# Altium PCB uw_ipmc_zynq.PcbDoc (part 3 of 3)
Units mil, origin at the board's own origin, x right, y up, seen from the top; angles counter-clockwise.
Board outline 3228.35 x 1181.1 mil, 10 copper layers (Component Side, Ground Plane 1 (GND), Inner Layer 1, Inner Layer 2, Power Plane 1, Power Plane 2, Inner Layer 3, Inner Layer 4, Power Plane 3, Solder Side), stack 39.78 mil thick; 400 components, 397 nets, 1698 pads, 375 vias.
Unrouted connection lines stored in the file: 685.
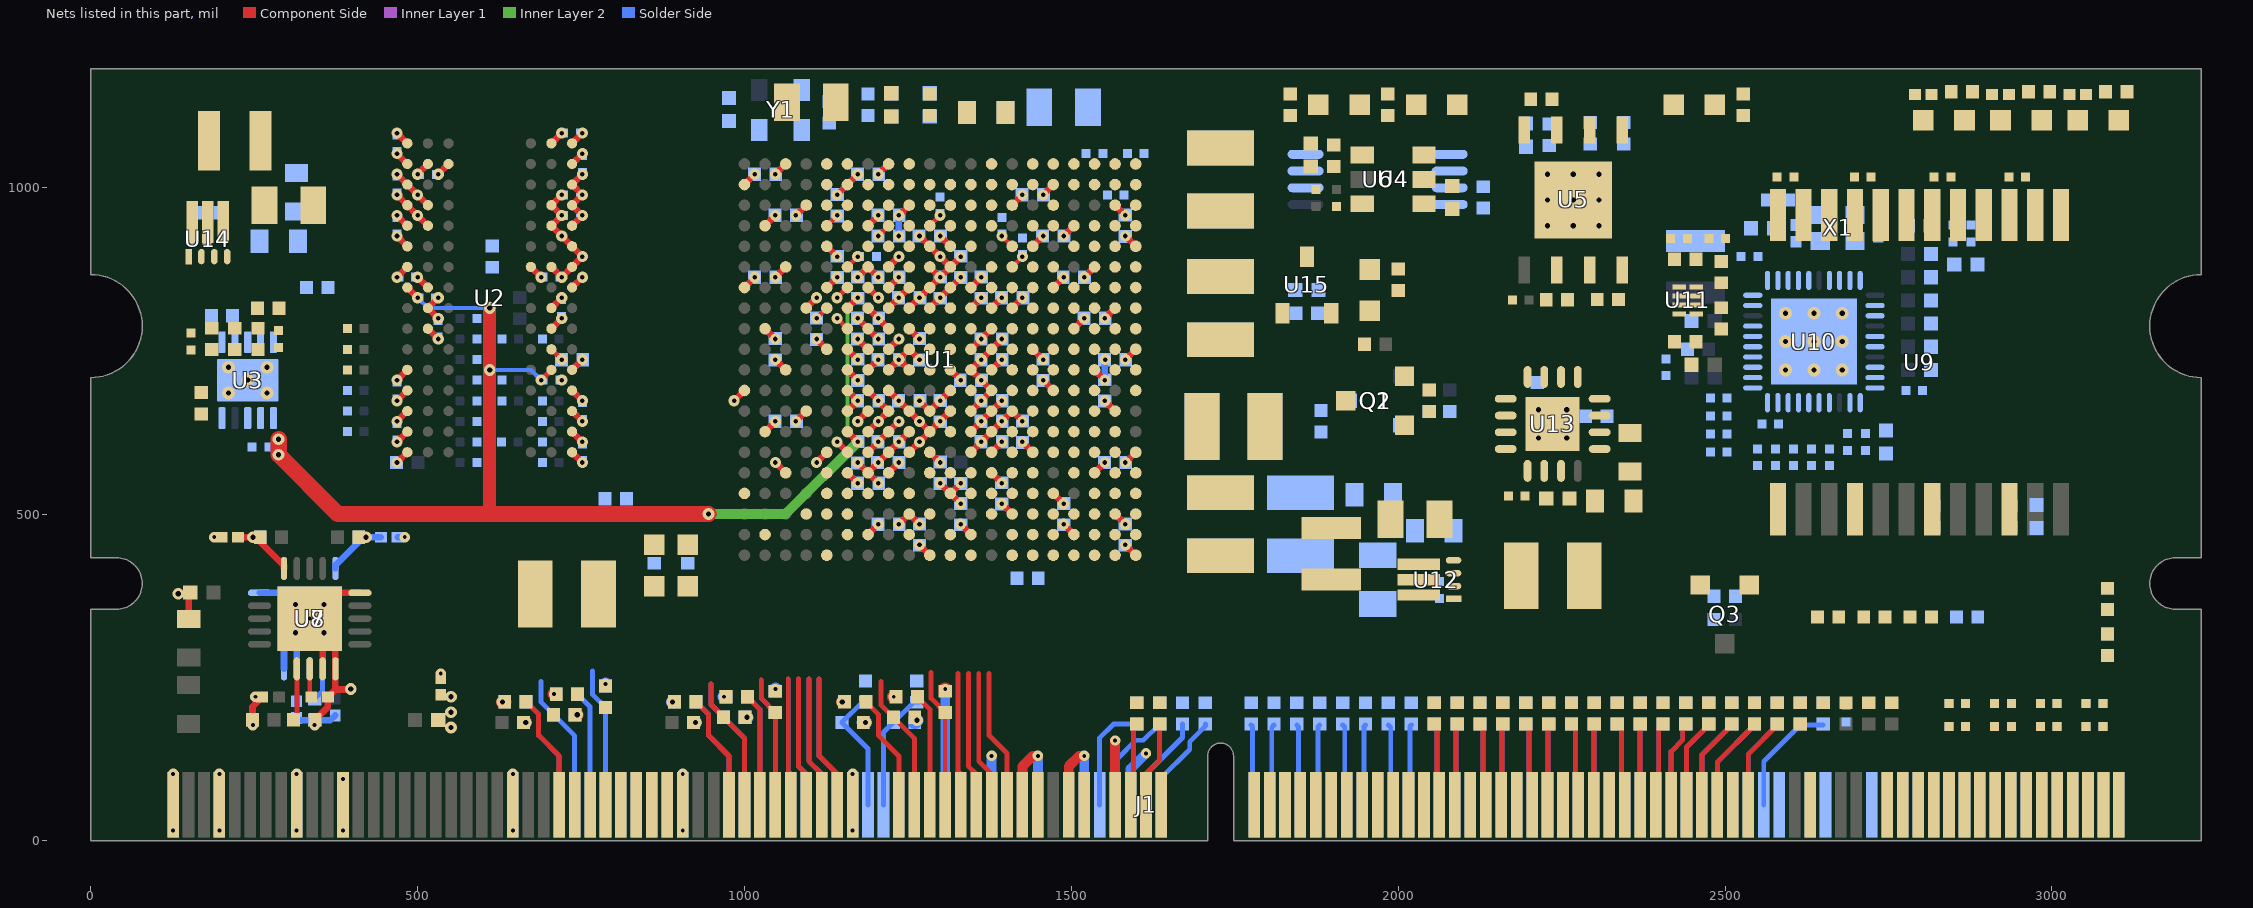
[diagram p11: the nets of this part, all layers, seen from the top]

## Via types
v1: diameter 17, hole 7, Component Side to Solder Side, 274 vias
v2: diameter 16, hole 6, Component Side to Solder Side, 42 vias
v3: diameter 19.68, hole 7.87, Component Side to Solder Side, 35 vias
v4: diameter 18, hole 8, Component Side to Solder Side, 24 vias

## Nets (pads, with @x,y where several pads share a name; then routed paths per layer and width w, separated by ;. In a path a pad name is that pad's centre, name@x,y a point inside that pad or via, vN(x,y) a via of type N, cw(c..) or ccw(c..) an arc to the next point about the centre after c; other vN are vias at no path point) (continued)
GND: C1.1 C2.1 C3.1 C4.1 C5.2 C6.2 C7.2 C8.2 C9.2 C10.2 C11.2 C12.2 C13.1 C14.1 C15.1 C16.1 C17.2 C18.2 C19.2 C20.2 C21.2 C22.2 C23.2 C24.2 C25.1 C26.1 C27.1 C28.1 C29.1 C30.2 C31.2 C32.2 C33.2 C34.2 C35.2 C36.2 C37.2 C38.2 C39.2 C40.2 C41.2 C42.2 C43.2 C44.2 C45.2 C46.2 C47.2 C48.2 C49.2 C50.2 C51.2 C52.2 C53.2 C54.2 C55.2 C56.2 C57.2 C58.2 C59.2 C60.2 C61.2 C62.2 C63.2 C64.2 C65.2 C66.2 C67.2 C68.2 C69.2 C70.2 C71.2 C72.2 C73.2 C74.2 C75.2 C76.2 C77.2 C78.2 C79.2 C80.2 C81.2 C82.2 C83.2 C84.2 C85.2 C86.2 C87.2 C88.2 C89.2 C90.2 C91.2 C92.2 C93.2 C94.2 C95.1 C96.1 C97.1 C98.1 C99.1 C100.1 C101.1 C102.1 C103.1 C104.1 C105.1 C106.1 C107.1 C108.2 C109.2 C110.2 C111.2 C112.1 C113.1 C114.1 C115.1 C116.1 C117.1 C118.1 C119.1 C120.1 C121.1 C122.1 C123.1 C124.1 C125.1 C126.1 C127.1 C128.1 C129.1 C130.1 C132.2 C134.2 C135.1 C136.1 C137.2 C139.2 C140.2 C142.2 C143.1 C144.2 C145.1 C146.1 C147.1 J1.1 J1.4 J1.9 J1.12 J1.23 J1.34 J1.45 J1.56 J1.59 J1.62 J1.89 J1.97 J1.102 J1.107 J1.111 J1.114 J1.119 J1.122 J1.123 J1.126 J1.131 J1.134 J1.145 J1.156 J1.167 J1.170 J1.173 J1.176 J1.179 J1.182 J1.185 J1.190 J1.193 J1.196 J1.199 J1.202 J1.205 J1.208 J1.211 J1.219 J1.222 J1.230 J1.233 J1.236 J1.241 J1.244 Q2.2 R29.1 R31.1 R32.1 R34.1 R43.1 R63.2 R64.2 R68.2 R71.1 R73.1 R74.1 R75.1 R80.1 R82.1 R86.1 R87.2 R88.2 R95.1 R96.1 R100.1 R101.1 R106.1 R107.1 R112.1 R113.1 R120.1 R121.1 R179.2 R180.1 R181.1 R182.1 R184.1 R185.1 R209.1 R210.1 R211.1 R212.1 R213.1 R214.1 R215.1 R216.1 U1.A8 U1.A18 U1.B1 U1.B11 U1.C4 U1.C9 U1.C14 U1.D17 U1.E10 U1.E20 U1.F3 U1.F7 U1.F10 U1.F11 U1.G10 U1.G12 U1.G16 U1.H7 U1.H9 U1.H11 U1.H13 U1.H19 U1.J2 U1.J8 U1.J10 U1.J12 U1.K5 U1.K7 U1.K9 U1.K10 U1.K11 U1.K13 U1.K15 U1.L8 U1.L9 U1.L10 U1.L12 U1.L18 U1.M1 U1.M7 U1.M11 U1.M13 U1.N4 U1.N8 U1.N10 U1.N12 U1.N14 U1.P7 U1.P9 U1.P11 U1.P13 U1.P17 U1.R8 U1.R12 U1.R20 U1.T3 U1.T7 U1.T13 U1.U6 U1.U16 U1.V9 U1.V19 U1.W2 U1.W12 U1.Y5 U1.Y15 U2.A9 U2.B1 U2.B3 U2.B9 U2.D1 U2.D8 U2.E1 U2.E2 U2.E8 U2.F9 U2.G1 U2.G8 U2.G9 U2.J2 U2.J8 U2.M1 U2.M9 U2.P1 U2.P9 U2.T1 U2.T9 U3.4 U3.8 U3.11 U4.2 U5.4 U5.9 U6.4 U7.4 U7.5 U7.10 U7.21 U8.4 U8.5 U8.10 U8.21 U10.41 U11.4 U12.5 U13.6 U13.17 U14.5 U15.1 X1.2 X1.4 Y1.2 | length 4398.8
  Component Side w10: v4(133.86,377.95) C95.1@150.24,377.95 ; R43.1@150,339.53 150,377.72 C95.1@150.24,377.95 ; C95.1@152.28,380 C95.1@150.24,377.95 ; v2(188.98,464.57) C102.1@199.8,464.57 ; C101.1@247.44,185.04 247.44,205.24 C100.1@257.32,215.12 ; v2(251.97,220.47) 252.44,220 C100.1@262.2,220 ; C96.1@343.11,185.04 362.8,204.72 C97.1@362.8,220 374.37,231.57 ; U7.4@354.68,263.23 U7.21@354.68,318.35 ; v4(397.64,232.28) 396.93,231.57 374.37,231.57 ; U7.10@411.77,379.37 374.37,379.37 v3(356.65,361.65) v2(335,340) v3(356.65,318.35) 374.37,300.63 U7.5@374.37,263.23 374.37,231.57 ; v1(468.5,578.74) U2.T1@484.25,594.49 ; v1(468.5,641.73) U2.P1@484.25,657.48 ; v1(468.5,704.72) U2.M1@484.25,720.47 ; v1(468.5,862.2) U2.G1@484.25,877.95 ; v1(468.5,956.69) U2.E1@484.25,940.94 ; v1(468.5,988.19) U2.D1@484.25,972.44 v1(500,956.69) U2.E2@515.75,940.94 ; v1(468.5,1051.18) U2.B1@484.25,1035.43 ; v1(531.5,799.21) U2.J2@515.75,814.96 v1(531.5,830.71) ; v1(531.5,1019.68) U2.B3@547.24,1035.43 ; C106.1@535.43,249.02 v2(535.43,255.91) ; U2.J8@704.72,814.96 v1(720.47,830.71) ; U2.G8@704.72,877.95 v1(720.47,862.2) U2.G9@736.22,877.95 v1(751.97,893.7) U2.F9@736.22,909.45 v1(720.47,925.2) U2.E8@704.72,940.94 v1(720.47,956.69) U2.D8@704.72,972.44 v1(720.47,988.19) ; U2.T9@736.22,594.49 v1(751.97,578.74) ; U2.P9@736.22,657.48 v1(751.97,641.73) ; U2.M9@736.22,720.47 v1(751.97,736.22) ; U2.B9@736.22,1035.43 v1(751.97,1051.18) ; U2.A9@736.22,1066.93 v1(751.97,1082.68) ; v1(984.25,673.23) U1.M1@1000,688.98 ; U1.B1@1000,1003.94 v1(1015.75,1019.68) ; U1.J2@1031.5,783.46 v1(1047.24,767.72) ; v1(1047.24,578.74) U1.T3@1062.99,562.99 ; v1(1047.24,862.2) U1.F3@1062.99,877.95 ; v1(1078.74,641.73) U1.N4@1094.49,657.48 ; v1(1078.74,956.69) U1.C4@1094.49,972.44 ; v1(1110.24,767.72) U1.K5@1125.98,751.97 ; v2(1165.35,15.75) J1.45@1165.35,55.12 v2(1165.35,102.36) ; v1(1173.23,578.74) U1.T7@1188.98,562.99 ; v1(1173.23,767.72) U1.K7@1188.98,751.97 ; v1(1173.23,862.2) U1.F7@1188.98,877.95 v1(1204.72,862.2) ; U1.P7@1188.98,625.98 v1(1204.72,641.73) U1.N8@1220.47,657.48 v1(1204.72,673.23) U1.M7@1188.98,688.98 ; U1.H7@1188.98,814.96 v1(1204.72,799.21) U1.J8@1220.47,783.46 ; v1(1204.72,547.24) U1.T7@1188.98,562.99 ; v1(1204.72,1019.68) U1.A8@1220.47,1035.43 ; U1.L8@1220.47,720.47 v1(1236.22,736.22) ; v1(1236.22,484.25) U1.V9@1251.97,500 v1(1267.72,484.25) ; v1(1236.22,956.69) U1.C9@1251.97,972.44 ; U1.P9@1251.97,625.98 v1(1236.22,610.24) U1.R8@1220.47,594.49 v1(1204.72,578.74) U1.T7@1188.98,562.99 ; U1.L9@1251.97,720.47 v1(1236.22,736.22) ; U1.H9@1251.97,814.96 v1(1267.72,830.71) U1.G10@1283.46,846.46 v1(1299.21,862.2) ; v1(1267.72,673.23) U1.N10@1283.46,657.48 v1(1299.21,673.23) U1.M11@1314.96,688.98 ; v1(1267.72,736.22) U1.K9@1251.97,751.97 v1(1236.22,736.22) ; v1(1267.72,925.2) U1.E10@1283.46,909.45 v1(1299.21,893.7) U1.F11@1314.96,877.95 ; U1.F10@1283.46,877.95 v1(1299.21,862.2) ; v1(1330.71,484.25) U1.W12@1346.46,468.5 ; v1(1330.71,893.7) U1.F11@1314.96,877.95 ; U1.R12@1346.46,594.49 v1(1362.2,610.24) U1.P13@1377.95,625.98 v1(1393.7,641.73) U1.N14@1409.45,657.48 v1(1425.2,641.73) ; U1.N12@1346.46,657.48 v1(1362.2,673.23) U1.M13@1377.95,688.98 v1(1362.2,704.72) U1.L12@1346.46,720.47 v1(1362.2,736.22) U1.K13@1377.95,751.97 v1(1393.7,767.72) ; U1.G12@1346.46,846.46 v1(1362.2,862.2) ; U1.T13@1377.95,562.99 v1(1393.7,547.24) ; U1.H13@1377.95,814.96 v1(1393.7,830.71) ; U1.C14@1409.45,972.44 v1(1425.2,988.19) ; U1.K15@1440.94,751.97 v1(1456.69,736.22) ; U1.U16@1472.44,531.5 v1(1488.19,515.75) ; U1.G16@1472.44,846.46 v1(1488.19,862.2) ; v1(1488.19,925.2) U1.D17@1503.94,940.94 ; U1.L18@1535.43,720.47 v1(1551.18,704.72) ; v1(1551.18,799.21) U1.H19@1566.93,814.96 ; U1.V19@1566.93,500 v1(1582.68,484.25) ; v1(1582.68,578.74) U1.R20@1598.43,594.49 ; v1(1582.68,925.2) U1.E20@1598.43,909.45 ; v1(1299.21,862.2) U1.F11@1314.96,877.95
  Component Side w12: v2(905.51,15.75) J1.34@905.51,55.12 v2(905.51,102.36)
  Component Side w15: v2(125.98,15.75) J1.1@125.98,55.12 v2(125.98,102.36) ; v2(196.85,15.75) J1.4@196.85,55.12 v2(196.85,102.36) ; v2(314.96,15.75) J1.9@314.96,55.12 v2(314.96,102.36) ; v2(385.83,15.75) J1.12@385.83,55.12 ; J1.56@1425.2,55.12 1425.2,114.17 1440.94,129.92 v2(1448.82,129.92) ; J1.59@1496.06,55.12 1496.06,114.17 1511.81,129.92 v2(1519.69,129.92) ; J1.62@1566.93,55.12 v2(1566.93,153.54)
  Component Side w20: v2(708.66,224.41) R95.1@712.01,224.41 ; v2(1228.35,220.47) R120.1@1231.69,220.47 ; R121.1@1307.09,228.94 v2(1307.09,232.28)
  Solder Side w10: C104.1@247.44,185.04 247.44,177.76 v2(248.03,177.17) ; U8.10@258.23,379.37 295.63,379.37 v3(313.35,361.65) v2(335,340) 315.31,320.32 U8.4@315.31,263.23 ; U8.5@295.63,263.23 295.63,300.63 v3(313.35,318.35) ; C99.1@314.96,187.99 318.5,184.45 C98.1@342.52,184.45 ; v2(342.52,177.17) C98.1@342.52,184.45 ; C103.1@374.02,191.93 366.54,184.45 C98.1@342.52,184.45 ; C105.1@469.49,464.57 v2(480.31,464.57) ; C4.1@717.52,704.72 v1(720.47,704.72) ; v1(1236.22,925.19) C40.2@1236.22,956.1 ; C54.2@1551.18,701.38 v1(1551.18,704.72) 1551.18,735.64 v1(1551.76,736.22)
  Solder Side w12: v2(645.67,15.75) J1.145@645.67,55.12 v2(645.67,102.36)
  Solder Side w15: J1.134@385.83,55.12 v2(385.83,94.49) ; J1.173@1307.09,55.12 v2(1307.09,232.28) ; J1.176@1377.95,55.12 v2(1377.95,129.92) ; J1.179@1448.82,55.12 v2(1448.82,129.92) ; J1.182@1519.69,55.12 v2(1519.69,129.92) ; J1.185@1590.55,55.12 1590.55,110.24 v2(1614.17,133.86)
  Solder Side w20: R101.1@787.4,236.81 v2(787.4,240.16) ; v2(968.5,220.47) R112.1@971.85,220.47 ; R113.1@1047.24,228.94 v2(1047.24,232.28)
  other v3: 313.35,318.35 356.65,318.35 313.35,361.65 356.65,361.65 2214.57,616.14 2257.87,616.14 2214.57,659.45 2257.87,659.45 210.63,685.04 269.69,685.04 240.16,704.72 2592.52,720.47 2635.83,720.47 2679.13,720.47 210.63,724.41 269.69,724.41 2592.52,763.78 2635.83,763.78 2679.13,763.78 2592.52,807.09 2635.83,807.09 2679.13,807.09 2228.35,940.94 2267.72,940.94 2307.09,940.94 2228.35,980.32 2267.72,980.32 2307.09,980.32 2228.35,1019.69 2267.72,1019.69 2307.09,1019.69
GPIO_0: J1.168 R3.2 R114.1 | length 191.4
  Solder Side w7.5: R114.1@1185.04,212.01 1179.92,212.01 R3.2@1149.02,181.1 1188.98,141.14 J1.168@1188.98,55.12
GPIO_1: J1.169 R4.2 R115.1 | length 185
  Solder Side w7.5: J1.169@1212.6,55.12 1212.6,165.95 R4.2@1227.76,181.1 1258.66,212.01 R115.1@1267.72,212.01
GPIO_2: J1.183 R116.1 | length 167.8
  Solder Side w7.5: J1.183@1543.31,55.12 1543.31,157.48 1564.49,178.66 R116.1@1600,178.66
GPIO_3: J1.184 R122.1 | length 158.5
  Solder Side w7.5: J1.184@1566.93,55.12 1570.87,59.06 1570.87,125.98 1598.78,153.9 1610.24,153.9 R122.1@1635,178.66
GPIO_4: J1.63 R123.1 | length 126.1
  Component Side w7.5: J1.63@1590.55,55.12 1595.28,59.84 1595.28,172.56 R123.1@1600,177.28
GPIO_5: J1.64 R124.1 | length 132.2
  Component Side w7.5: J1.64@1614.17,55.12 1614.17,102.36 1635,123.19 R124.1@1635,178.66
GPIO_6: J1.186 R125.1 | length 146.7
  Solder Side w7.5: J1.186@1614.17,55.12 1614.17,102.36 1670,158.19 R125.1@1670,178.66
GPIO_7: J1.187 R126.1 | length 151.4
  Solder Side w7.5: J1.187@1637.8,55.12 1637.8,96.46 1681.1,139.76 1681.1,151.42 1705,175.32 R126.1@1705,178.66
GPIO_8: J1.188 R127.1 | length 124
  Solder Side w7.5: R127.1@1775,177.28 1777.26,175.02 1777.26,57.38 J1.188@1779.53,55.12
GPIO_9: J1.189 R128.1 | length 125
  Solder Side w7.5: J1.189@1803.15,55.12 1806.57,58.54 1806.57,173.86 R128.1@1810,177.28
GPIO_10: J1.191 R129.1 | length 124.4
  Solder Side w7.5: R129.1@1845,177.28 1847.7,174.59 1847.7,57.82 J1.191@1850.39,55.12
GPIO_11: J1.192 R130.1 | length 124.6
  Solder Side w7.5: J1.192@1874.02,55.12 1877.01,58.11 1877.01,174.29 R130.1@1880,177.28
GPIO_12: J1.194 R131.1 | length 124.8
  Solder Side w7.5: R131.1@1915,177.28 1918.13,174.15 1918.13,58.25 J1.194@1921.26,55.12
GPIO_13: J1.195 R102.1 | length 124.3
  Solder Side w7.5: J1.195@1944.88,55.12 1947.44,57.68 1947.44,174.72 R102.1@1950,177.28
GPIO_14: J1.197 R142.1 | length 125.1
  Solder Side w7.5: R142.1@1985,177.28 1988.56,173.72 1988.56,58.68 J1.197@1992.13,55.12
GPIO_15: J1.198 R143.1 | length 123.9
  Solder Side w7.5: J1.198@2015.75,55.12 2017.87,57.24 2017.87,175.16 R143.1@2020,177.28
GPIO_16: J1.78 R144.1 | length 125.5
  Component Side w7.5: R144.1@2055,177.28 2059,173.29 2059,59.11 J1.78@2062.99,55.12
GPIO_17: J1.200 R145.1 | length 125.5
  Solder Side w7.5: R145.1@2055,177.28 2059,173.29 2059,59.11 J1.200@2062.99,55.12
GPIO_18: J1.79 R146.1 | length 123.6
  Component Side w7.5: J1.79@2086.61,55.12 2088.31,56.81 2088.31,175.59 R146.1@2090,177.28
GPIO_19: J1.201 R147.1 | length 123.6
  Solder Side w7.5: J1.201@2086.61,55.12 2088.31,56.81 2088.31,175.59 R147.1@2090,177.28
GPIO_20: J1.81 R148.1 | length 125.8
  Component Side w7.5: R148.1@2125,177.28 2129.43,172.85 2129.43,59.55 J1.81@2133.86,55.12
GPIO_21: J1.203 R149.1 | length 125.8
  Solder Side w7.5: R149.1@2125,177.28 2129.43,172.85 2129.43,59.55 J1.203@2133.86,55.12
GPIO_22: J1.82 R150.1 | length 123.2
  Component Side w7.5: J1.82@2157.48,55.12 2158.74,56.38 2158.74,176.02 R150.1@2160,177.28
GPIO_23: J1.204 R151.1 | length 123.2
  Solder Side w7.5: J1.204@2157.48,55.12 2158.74,56.38 2158.74,176.02 R151.1@2160,177.28
GPIO_24: J1.84 R152.1 | length 126.2
  Component Side w7.5: R152.1@2195,177.28 2199.87,172.42 2199.87,59.98 J1.84@2204.72,55.12
GPIO_25: J1.206 R153.1 | length 126.2
  Solder Side w7.5: R153.1@2195,177.28 2199.87,172.42 2199.87,59.98 J1.206@2204.72,55.12
GPIO_26: J1.85 R154.1 | length 122.9
  Component Side w7.5: J1.85@2228.35,55.12 2229.17,55.94 2229.17,176.46 R154.1@2230,177.28
GPIO_27: J1.207 R155.1 | length 122.9
  Solder Side w7.5: J1.207@2228.35,55.12 2229.17,55.94 2229.17,176.46 R155.1@2230,177.28
GPIO_28: J1.87 R156.1 | length 126.6
  Component Side w7.5: R156.1@2265,177.28 2270.73,171.55 2270.73,59.98 J1.87@2275.59,55.12
GPIO_29: J1.209 R157.1 | length 126.6
  Solder Side w7.5: R157.1@2265,177.28 2270.73,171.55 2270.73,59.98 J1.209@2275.59,55.12
GPIO_30: J1.88 R158.1 | length 122.5
  Component Side w7.5: J1.88@2299.21,55.12 2299.61,55.51 2299.61,176.89 R158.1@2300,177.28
GPIO_31: J1.210 R159.1 | length 122.5
  Solder Side w7.5: J1.210@2299.21,55.12 2299.61,55.51 2299.61,176.89 R159.1@2300,177.28
GPIO_32: J1.90 R160.1 | length 126.9
  Component Side w7.5: R160.1@2335,177.28 2341.6,170.68 2341.6,59.98 J1.90@2346.46,55.12
GPIO_33: J1.212 R161.1 | length 126.9
  Solder Side w7.5: R161.1@2335,177.28 2341.6,170.68 2341.6,59.98 J1.212@2346.46,55.12
GPIO_34: J1.91 R162.1 | length 122.2
  Component Side w7.5: R162.1@2370,177.28 2370.04,177.24 J1.91@2370.08,55.12 J1.91@2370.08,55.12
GPIO_35: J1.213 R163.1 | length 122.2
  Solder Side w7.5: R163.1@2370,177.28 2370.04,177.24 J1.213@2370.08,55.12 J1.213@2370.08,55.12
GPIO_36: J1.92 R164.1 | length 126.8
  Component Side w7.5: J1.92@2393.7,55.12 2398.56,59.98 2398.56,170.84 R164.1@2405,177.28
GPIO_37: J1.214 R165.1 | length 126.8
  Solder Side w7.5: J1.214@2393.7,55.12 2398.56,59.98 2398.56,170.84 R165.1@2405,177.28
GPIO_38: J1.93 R166.1 | length 131.6
  Component Side w7.5: J1.93@2417.32,55.12 2417.32,136.58 2435.2,154.46 2435.2,172.49 R166.1@2440,177.28
GPIO_39: J1.215 R167.1 | length 131.6
  Solder Side w7.5: J1.215@2417.32,55.12 2417.32,136.58 2435.2,154.46 2435.2,172.49 R167.1@2440,177.28
GPIO_40: J1.94 R168.1 | length 136.3
  Component Side w7.5: J1.94@2440.94,55.12 2440.94,143.23 R168.1@2475,177.28
GPIO_41: J1.216 R169.1 | length 136.3
  Solder Side w7.5: J1.216@2440.94,55.12 2440.94,143.23 R169.1@2475,177.28
GPIO_42: J1.95 R170.1 | length 141
  Component Side w7.5: J1.95@2464.57,55.12 2464.57,131.85 R170.1@2510,177.28
GPIO_43: J1.217 R171.1 | length 141
  Solder Side w7.5: J1.217@2464.57,55.12 2464.57,131.85 R171.1@2510,177.28
GPIO_44: J1.96 R172.1 | length 145.7
  Component Side w7.5: J1.96@2488.19,55.12 2488.19,120.47 R172.1@2545,177.28
GPIO_45: J1.218 R173.1 | length 145.7
  Solder Side w7.5: J1.218@2488.19,55.12 2488.19,120.47 R173.1@2545,177.28
GPIO_46: J1.98 R174.1 | length 140.6
  Component Side w7.5: J1.98@2535.43,55.12 2535.43,132.72 R174.1@2580,177.28
GPIO_47: J1.220 R1.2 R175.1 | length 140.6
  Solder Side w7.5: J1.220@2535.43,55.12 2535.43,132.72 R175.1@2580,177.28
GPIO_48: J1.221 R2.2 R132.1 | length 180.3
  Solder Side w7.5: J1.221@2559.06,55.12 2559.06,121.34 2615,177.28 R2.2@2650,177.28
HA0: J1.115 R199.2 R209.2 U1.E12
HA1: J1.237 R200.2 R210.2 U1.A9
HA2: J1.116 R201.2 R211.2 U1.F13
HA3: J1.238 R202.2 R212.2 U1.B15
HA4: J1.117 R203.2 R213.2 U1.D16
HA5: J1.239 R204.2 R214.2 U1.B14
HA6: J1.118 R205.2 R215.2 U1.B12
HA7: J1.240 R206.2 R216.2 U1.C12
HNDL_SW: J1.224 R139.2 U1.E19
INIT_B: R39.1 U1.R10 | length 22.3
  Component Side w10: U1.R10@1283.46,594.49 v1(1299.21,578.74)
IPMB-A_SCL: J1.120 R189.1 U1.E9
IPMB-A_SDA: J1.121 R190.1 U1.C6
IPMB-B_SCL: J1.242 R191.1 U1.D9
IPMB-B_SDA: J1.243 R192.1 U1.E8
IPMB-L_SCL_0: J1.26 R93.2 U1.W9 | length 178.4
  Component Side w7.5: R93.2@665.94,212.6 685.04,193.5 685.04,161.42 716.54,129.92 J1.26@716.54,55.12
IPMB-L_SCL_1: J1.148 R98.2 U1.V10 | length 178.4
  Solder Side w7.5: R98.2@665.94,212.6 685.04,193.5 685.04,161.42 716.54,129.92 J1.148@716.54,55.12
IPMB-L_SCL_2: J1.37 R104.2 U1.T14 | length 178.4
  Component Side w7.5: R104.2@925.79,212.6 944.88,193.5 944.88,161.42 976.38,129.92 J1.37@976.38,55.12
IPMB-L_SCL_3: J1.159 R110.2 U1.V15 | length 178.4
  Solder Side w7.5: R110.2@925.79,212.6 944.88,193.5 944.88,161.42 976.38,129.92 J1.159@976.38,55.12
IPMB-L_SCL_4: J1.48 R118.2 U1.T20 | length 178.4
  Component Side w7.5: R118.2@1185.63,212.6 1204.72,193.5 1204.72,161.42 1236.22,129.92 J1.48@1236.22,55.12
IPMB-L_SDA_0: J1.27 R94.2 U1.U9
IPMB-L_SDA_1: J1.149 R99.2 U1.V6 | length 210.2
  Solder Side w7.5: 688.98,244.09 688.98,212.01 R99.2@708.07,192.91 740.16,160.83 J1.149@740.16,55.12
IPMB-L_SDA_2: J1.38 R105.2 U1.T15 | length 206.2
  Component Side w7.5: 948.82,240.16 948.82,208.66 967.91,189.57 R105.2@967.91,188.98 1000,156.89 J1.38@1000,55.12
IPMB-L_SDA_3: J1.160 R111.2 U1.W15 | length 206.2
  Solder Side w7.5: 948.82,240.16 948.82,208.66 967.91,189.57 R111.2@967.91,188.98 1000,156.89 J1.160@1000,55.12
IPMB-L_SDA_4: J1.49 R119.2 U1.U20 | length 210.2
  Component Side w7.5: 1208.66,244.09 1208.66,208.07 R119.2@1227.76,188.98 1259.84,156.89 J1.49@1259.84,55.12
JTAG_MASTER_TCK: J1.231 R135.1
JTAG_MASTER_TDI: J1.232 U1.E17
JTAG_MASTER_TDO: J1.109 R136.1
JTAG_MASTER_TMS: J1.110 R134.1
JTAG_MASTER_TRST: J1.108 R133.1
LED_10_100: C117.2 D2.2 U10.24
LED_1000: C116.2 D3.2 R65.1 U10.22
LED_ACT: C118.2 D1.2 R66.1 U10.21
MDC: R61.1 U10.40 U11.7
MDIO: R60.1 U10.39 U11.6
MDIO_CLK: R58.1 U1.C10 U11.2
MDIO_DIO: R59.1 U1.C11 U11.3
MP_ENA_0: J1.28 R95.2 U1.U8
MP_ENA_1: J1.150 R100.2 U1.W6 | length 177.2
  Solder Side w7.5: R100.2@744.69,224.41 763.78,205.31 J1.150@763.78,55.12
MP_ENA_2: J1.39 R106.2 U1.P14 | length 173.3
  Component Side w7.5: R106.2@1004.53,220.47 1023.62,201.38 J1.39@1023.62,55.12
MP_ENA_3: J1.161 R112.2 U1.U14 | length 173.3
  Solder Side w7.5: R112.2@1004.53,220.47 1023.62,201.38 J1.161@1023.62,55.12
MP_ENA_4: J1.50 R120.2 U1.V20 | length 173.3
  Component Side w7.5: R120.2@1264.37,220.47 1283.46,201.38 J1.50@1283.46,55.12
MP_FLT_0: J1.32 U1.U5
MP_FLT_1: J1.154 U1.U12
MP_FLT_2: J1.43 U1.W14 | length 201.1
  Component Side w7.5: 1098.43,248.03 1098.43,122.05 1118.11,102.36 J1.43@1118.11,55.12
MP_FLT_3: J1.165 U1.N18 | length 201.1
  Solder Side w7.5: 1098.43,248.03 1098.43,122.05 1118.11,102.36 J1.165@1118.11,55.12
MP_FLT_4: J1.54 U1.V16 | length 208.9
  Component Side w7.5: 1358.27,255.91 1358.27,122.05 1377.95,102.36 J1.54@1377.95,55.12
MP_PG_0: J1.30 U1.Y11
MP_PG_1: J1.152 U1.T10
MP_PG_2: J1.41 U1.Y16 | length 194.5
  Component Side w7.5: 1066.93,248.03 1066.93,106.3 1070.87,102.36 J1.41@1070.87,55.12
MP_PG_3: J1.163 U1.U18 | length 194.5
  Solder Side w7.5: 1066.93,248.03 1066.93,106.3 1070.87,102.36 J1.163@1070.87,55.12
MP_PG_4: J1.52 U1.Y18 | length 202.4
  Component Side w7.5: 1326.77,255.91 1326.77,106.3 1330.71,102.36 J1.52@1330.71,55.12
NetC27_2: C27.2 R33.1 R34.2 U3.1
NetC96_2: C96.2 U7.2 | length 80.2
  Component Side w7.5: C96.2@310.43,185.04 315.31,189.92 U7.2@315.31,263.23
NetC97_2: C97.2 U7.3 | length 44.1
  Component Side w7.5: U7.3@335,263.23 335,222.2 C97.2@337.2,220
NetC98_2: C98.2 U8.2 | length 51.1
  Solder Side w7.5: C98.2@342.52,217.13 354.69,229.29 U8.2@354.69,263.23
NetC99_2: C99.2 U8.3
NetC107_2: C107.2 R48.2 R49.2 R50.2 R51.2
NetC108_1: C108.1 U9.15
NetC109_1: C109.1 U9.18
NetC110_1: C110.1 U9.21
NetC111_1: C111.1 U9.24
NetC112_2: C112.2 U10.4 X1.1
NetC113_2: C113.2 U10.5 X1.3
NetC140_1: C140.1 U13.7
NetD1_1: D1.1 R67.2
NetD2_1: D2.1 R69.2
NetD3_1: D3.1 R70.2
NetD4_2: D4.2 R87.1
NetD5_2: D5.2 R88.1
NetD6_2: D6.2 R90.1
NetD7_2: D7.2 R91.1
NetD8_2: D8.2 R207.1
NetD9_2: D9.2 R208.1
NetL6_2: L6.2 U10.2
NetL8_1: L8.1 U12.6
NetL9_1: L9.1 U14.6
NetQ2_D: Q2.3 R84.1
NetR41_2: R41.2 U1.F6 | length 22.3
  Component Side w7: U1.F6@1157.48,877.95 v1(1173.23,893.7)
NetR48_1: R48.1 U9.1
NetR49_1: R49.1 U9.4
NetR50_1: R50.1 U9.7
NetR51_1: R51.1 U9.10
NetR62_1: R62.1 U10.20
NetR63_1: R63.1 U10.7
NetR77_1: R77.1 R80.2 U12.3
NetR79_1: R79.1 R82.2 U13.9
NetR85_1: R85.1 R86.2 U14.3
NetR102_2: R102.2 U1.R19
NetR108_2: R108.2 U1.U13
NetR132_2: R132.2 U1.G14
NetR133_2: R133.2 U1.C20
NetR134_2: R134.2 U1.B20
NetR135_2: R135.2 U1.B19
NetR136_2: R136.2 U1.A20 | length 1.4
  Component Side w7.5: U1.A20@1598.43,1035.43 U1.A20@1599.41,1036.42
NetR137_2: R137.2 U1.D18
NetR138_2: R138.2 U1.D19
NetR140_2: R140.2 U1.D20
NetR141_2: R141.2 U1.E18
PG_A: J1.228 U1.M20
PG_B: J1.229 U1.M17
PGOOD_1.0V: R83.1 U12.2 U13.4
PGOOD_1.5V: R89.1 U14.2
PGOOD_1.8V: Q2.1 R81.1 U13.5 U14.1
PHY_RESET: R68.1 U1.B5 U10.1
PL_GPIO_0: R114.2 U1.R16
PL_GPIO_1: R115.2 U1.R17
PL_GPIO_2: R116.2 U1.T17
PL_GPIO_3: R122.2 U1.R18
PL_GPIO_4: R123.2 U1.V17
PL_GPIO_5: R124.2 U1.V18
PL_GPIO_6: R125.2 U1.W18
PL_GPIO_7: R126.2 U1.W19
PL_GPIO_8: R127.2 U1.N17
PL_GPIO_9: R128.2 U1.P18
PL_GPIO_10: R129.2 U1.P15
PL_GPIO_11: R130.2 U1.P16
PL_GPIO_12: R131.2 U1.T19
PL_GPIO_14: R142.2 U1.M18
PL_GPIO_15: R143.2 U1.L19
PL_GPIO_16: R144.2 U1.L20
PL_GPIO_17: R145.2 U1.K19
PL_GPIO_18: R146.2 U1.J19
PL_GPIO_19: R147.2 U1.L16
PL_GPIO_20: R148.2 U1.L17
PL_GPIO_21: R149.2 U1.K17
PL_GPIO_22: R150.2 U1.K18
PL_GPIO_23: R151.2 U1.H16
PL_GPIO_24: R152.2 U1.H17
PL_GPIO_25: R153.2 U1.J18
PL_GPIO_26: R154.2 U1.H18
PL_GPIO_27: R155.2 U1.F19
PL_GPIO_28: R156.2 U1.F20
PL_GPIO_29: R157.2 U1.G17
PL_GPIO_30: R158.2 U1.G18
PL_GPIO_31: R159.2 U1.J20
PL_GPIO_32: R160.2 U1.H20
PL_GPIO_33: R161.2 U1.G19
PL_GPIO_34: R162.2 U1.G20
PL_GPIO_35: R163.2 U1.H15
PL_GPIO_36: R164.2 U1.G15
PL_GPIO_37: R165.2 U1.K14
PL_GPIO_38: R166.2 U1.J14
PL_GPIO_39: R167.2 U1.N15
PL_GPIO_40: R168.2 U1.N16
PL_GPIO_41: R169.2 U1.L14
PL_GPIO_42: R170.2 U1.L15
PL_GPIO_43: R171.2 U1.M14
PL_GPIO_44: R172.2 U1.M15
PL_GPIO_45: R173.2 U1.K16
PL_GPIO_46: R174.2 U1.J16
PL_GPIO_47: R175.2 U1.J15
PL_LED_RED: R91.2 U1.U7
PL_LED_YELLOW: R90.2 U1.V5
PROG_B: R38.1 U1.L6 | length 22.3
  Component Side w10: U1.L6@1157.48,720.47 v1(1173.23,704.72)
PS_CLK: R177.1 U1.E7
PS_LED_RED: R207.2 U1.B9
PS_LED_YELLOW: R208.2 U1.B13
PS_MIO7: R185.2 U1.D8 | length 22.3
  Component Side w7.5: v1(1204.72,925.2) U1.D8@1220.47,940.94
PS_MIO8: R186.2 U1.D5 | length 22.3
  Component Side w7.5: U1.D5@1125.98,940.94 v1(1141.73,956.69)
PS_POR_B: R176.2 U1.C7 U15.3
PS_SRST_B: Q3.2 R196.1 U1.B10
PS_TX_CLK: R187.1 U1.A19
PS_TX_CTL: R198.1 U1.F14 | length 22.3
  Component Side w7: U1.F14@1409.45,877.95 v1(1425.2,893.7)
PS_TX_D0: R188.1 U1.E14 | length 22.3
  Component Side w7: v1(1393.7,925.2) U1.E14@1409.45,909.45
PS_TX_D1: R193.1 U1.B18
PS_TX_D2: R194.1 U1.D10 | length 22.3
  Component Side w7: U1.D10@1283.46,940.94 v1(1299.21,956.69)
PS_TX_D3: R195.1 U1.A17
PWR_ENA_0: J1.29 R96.2 U1.W11
PWR_ENA_1: J1.151 R101.2 U1.T11 | length 212.9
  Solder Side w7.5: 767.72,259.84 767.72,223.82 R101.2@787.4,204.13 J1.151@787.4,55.12
PWR_ENA_2: J1.40 R107.2 U1.R14 | length 199.9
  Component Side w7.5: 1025.59,246.06 1025.59,217.91 R107.2@1047.24,196.26 J1.40@1047.24,55.12
PWR_ENA_3: J1.162 R113.2 U1.U15 | length 199.9
  Solder Side w7.5: 1025.59,246.06 1025.59,217.91 R113.2@1047.24,196.26 J1.162@1047.24,55.12
PWR_ENA_4: J1.51 R121.2 U1.W20 | length 211.7
  Component Side w7.5: 1285.43,257.87 1285.43,217.91 R121.2@1307.09,196.26 J1.51@1307.09,55.12
PWR_FLT_0: J1.33 U1.Y12
PWR_FLT_1: J1.155 U1.V13
PWR_FLT_2: J1.44 U1.Y14 | length 204.3
  Component Side w7.5: 1114.17,248.03 1114.17,129.92 1141.73,102.36 J1.44@1141.73,55.12
PWR_FLT_3: J1.166 U1.P19 | length 204.3
  Solder Side w7.5: 1114.17,248.03 1114.17,129.92 1141.73,102.36 J1.166@1141.73,55.12
PWR_FLT_4: J1.55 U1.W16 | length 212.2
  Component Side w7.5: 1374.02,255.91 1374.02,161.42 1401.57,133.86 J1.55@1401.57,55.12
PWR_PG_0: J1.31 U1.T5
PWR_PG_1: J1.153 U1.T12
PWR_PG_2: J1.42 U1.Y17 | length 197.8
  Component Side w7.5: 1082.68,248.03 1082.68,114.17 1094.49,102.36 J1.42@1094.49,55.12
PWR_PG_3: J1.164 U1.U19 | length 197.8
  Solder Side w7.5: 1082.68,248.03 1082.68,114.17 1094.49,102.36 J1.164@1094.49,55.12
PWR_PG_4: J1.53 U1.Y19 | length 205.7
  Component Side w7.5: 1342.52,255.91 1342.52,114.17 1354.33,102.36 J1.53@1354.33,55.12
PYLD12V_EN: J1.225 U1.F16
QSPI_CLK: R184.2 U1.A5 U5.6
QSPI_DQ0: R180.2 U1.B8 U5.5
QSPI_DQ1: R181.2 U1.D6 U5.2
QSPI_DQ2: R182.2 U1.B7 U5.3
QSPI_DQ3: R183.2 U1.A6 U5.7
RGMII_RX_CLK: R53.1 U1.B17
RGMII_RX_CTL: R52.1 U1.D13
RGMII_RX_D0: R54.1 U1.D11
RGMII_RX_D1: R55.1 U1.A16
RGMII_RX_D2: R56.1 U1.F15
RGMII_RX_D3: R57.1 U1.A15
RGMII_TX_CLK: R187.2 U10.33
RGMII_TX_CTL: R198.2 U10.32
RGMII_TX_D0: R188.2 U10.34
RGMII_TX_D1: R193.2 U10.35
RGMII_TX_D2: R194.2 U10.36
RGMII_TX_D3: R195.2 U10.37
RGMII_VREF_1.25V: C147.2 R178.2 R179.1 U1.E11 | length 22.3
  Component Side w10: v1(1299.21,925.2) U1.E11@1314.96,909.45
RX_CLK: R53.2 R72.2 U10.31
RX_DV: R52.2 R71.2 U10.30
RXD0: R54.2 R73.2 U10.29
RXD1: R55.2 R74.2 U10.28
RXD2: R56.2 R75.2 U10.26
RXD3: R57.2 R76.2 U10.25
SPI_CLK: U1.C16 U4.1 U6.6
SPI_MISO: U1.C13 U4.4 U6.2
SPI_MOSI: U1.D15 U4.3 U6.5
TRX0_N: U9.22 U10.10
TRX0_P: U9.23 U10.9
TRX1_N: U9.19 U10.13
TRX1_P: U9.20 U10.12
TRX2_N: U9.16 U10.16
TRX2_P: U9.17 U10.15
TRX3_N: U9.13 U10.19
TRX3_P: U9.14 U10.18
UART_RX: J1.60 U1.C5
UART_TX: J1.57 U1.C8
VCC1.0: C78.1 C79.1 C80.1 C81.1 C82.1 C83.1 C84.1 C85.1 C86.1 C87.1 C88.1 C89.1 C90.1 C91.1 C92.1 C93.1 C94.1 C135.2 L8.2 R77.2 U1.G7 U1.G11 U1.G13 U1.H10 U1.H12 U1.J7 U1.J13 U1.K12 U1.L7 U1.L13 U1.M12 U1.N7 U1.N13 U1.P8 U1.P12 U1.R7 U1.R13 U12.4 | length 423.2
  Component Side w10: v1(1173.23,641.73) U1.N7@1188.98,657.48 ; v1(1173.23,799.21) U1.J7@1188.98,783.46 v1(1204.72,767.72) ; U1.R7@1188.98,594.49 v1(1204.72,610.24) U1.P8@1220.47,625.98 v1(1236.22,641.73) ; U1.L7@1188.98,720.47 v1(1204.72,736.22) ; U1.G7@1188.98,846.46 v1(1204.72,830.71) ; U1.H10@1283.46,814.96 v1(1299.21,830.71) U1.G11@1314.96,846.46 v1(1330.71,862.2) ; U1.P12@1346.46,625.98 v1(1362.2,641.73) U1.N13@1377.95,657.48 v1(1393.7,673.23) ; U1.K12@1346.46,751.97 v1(1362.2,767.72) U1.J13@1377.95,783.46 ; U1.H12@1346.46,814.96 v1(1362.2,830.71) ; U1.R13@1377.95,594.49 v1(1393.7,610.24) ; U1.L13@1377.95,720.47 v1(1393.7,736.22)
VCC1.5: C5.1 C6.1 C7.1 C8.1 C9.1 C10.1 C11.1 C12.1 C17.1 C18.1 C19.1 C20.1 C21.1 C22.1 C23.1 C24.1 C29.2 C67.1 C68.1 C69.1 C70.1 C71.1 C72.1 C143.2 L9.2 R30.1 R33.2 R85.2 U1.A3 U1.D2 U1.E5 U1.G1 U1.H4 U1.L3 U1.P2 U1.R5 U1.U1 U1.V4 U2.A1 U2.A8 U2.B2 U2.C1 U2.C9 U2.D2 U2.D9 U2.E9 U2.F1 U2.G7 U2.H2 U2.H9 U2.K2 U2.K8 U2.N1 U2.N9 U2.R1 U2.R9 U3.2 U14.4 | length 645.9
  Component Side w10: v1(468.5,610.24) U2.R1@484.25,625.98 ; v1(468.5,673.23) U2.N1@484.25,688.98 ; v1(468.5,925.2) U2.F1@484.25,909.45 ; v1(468.5,1019.68) U2.C1@484.25,1003.94 v1(500,988.19) U2.D2@515.75,972.44 ; v1(468.5,1082.68) U2.A1@484.25,1066.93 ; v1(500,862.2) U2.H2@515.75,846.46 ; v1(500,1019.68) U2.B2@515.75,1035.43 ; U2.K2@515.75,783.46 v1(531.5,767.72) ; U2.G7@673.23,877.95 v1(688.98,862.2) ; U2.K8@704.72,783.46 v1(720.47,799.21) ; U2.A8@704.72,1066.93 v1(720.47,1082.68) ; U2.R9@736.22,625.98 v1(751.97,610.24) ; U2.N9@736.22,688.98 v1(751.97,673.23) ; U2.H9@736.22,846.46 v1(751.97,862.2) ; U2.E9@736.22,940.94 v1(751.97,956.69) U2.D9@736.22,972.44 v1(751.97,988.19) U2.C9@736.22,1003.94 v1(751.97,1019.68) ; U1.G1@1000,846.46 v1(1015.75,862.2) ; U1.P2@1031.5,625.98 v1(1047.24,641.73) ; U1.D2@1031.5,940.94 v1(1047.24,956.69) ; v1(1047.24,736.22) U1.L3@1062.99,720.47 ; v1(1047.24,1019.68) U1.A3@1062.99,1035.43 ; U1.H4@1094.49,814.96 v1(1110.24,830.71) ; v1(1110.24,578.74) U1.R5@1125.98,594.49 ; U1.E5@1125.98,909.45 v1(1141.73,893.7)
VCC1.8: C30.1 C31.1 C34.1 C35.1 C36.1 C37.1 C38.1 C48.1 C49.1 C50.1 C58.1 C59.1 C60.1 C114.2 C136.2 D8.1 D9.1 L1.2 L2.2 L3.2 Q3.1 R35.1 R37.1 R58.2 R59.2 R64.1 R79.2 R178.1 R196.2 U1.A13 U1.B16 U1.D12 U1.E15 U1.F8 U1.G9 U1.H8 U1.J11 U1.K8 U1.L11 U1.M8 U1.N9 U1.N11 U1.P10 U1.R9 U4.6 U6.3 U6.7 U6.8 U11.1 U11.5 U13.10 U13.11 U13.12 U13.13 U13.14 | length 334.1
  Component Side w10: U1.M8@1220.47,688.98 v1(1236.22,673.23) U1.N9@1251.97,657.48 v1(1267.72,641.73) U1.P10@1283.46,625.98 ; U1.K8@1220.47,751.97 v1(1236.22,767.72) ; U1.H8@1220.47,814.96 v1(1236.22,830.71) U1.G9@1251.97,846.46 ; U1.F8@1220.47,877.95 v1(1236.22,893.7) ; U1.R9@1251.97,594.49 v1(1267.72,610.24) U1.P10@1283.46,625.98 ; U1.N11@1314.96,657.48 v1(1299.21,641.73) U1.P10@1283.46,625.98 ; U1.L11@1314.96,720.47 v1(1330.71,704.72) ; U1.E15@1440.94,909.45 v1(1456.69,925.2) ; v1(1456.69,988.19) U1.B16@1472.44,1003.94
VCC3.3: C28.2 C32.1 C33.1 C102.2 C105.2 C106.2 C122.2 C123.2 C132.1 C134.1 C137.1 C138.1 C142.1 C144.1 C146.2 D4.1 D6.1 D7.1 J1.65 J1.66 J1.67 J1.68 J1.69 J1.70 J1.71 J1.72 J1.73 J1.74 J1.75 J1.76 J1.77 J1.80 J1.83 J1.86 L4.1 L5.2 Q1.2 R1.1 R2.1 R3.1 R4.1 R36.1 R44.2 R45.2 R46.2 R47.2 R62.2 R67.1 R69.1 R70.1 R78.1 R81.2 R83.2 R89.2 R92.1 R93.1 R94.1 R97.1 R98.1 R99.1 R103.1 R104.1 R105.1 R108.1 R109.1 R110.1 R111.1 R117.1 R118.1 R119.1 R139.1 R189.2 R190.2 R191.2 R192.2 R197.1 R199.1 R200.1 R201.1 R202.1 R203.1 R204.1 R205.1 R206.1 U3.7 U3.10 U5.8 U7.15 U8.15 U10.3 U12.1 U12.7 U13.1 U13.2 U13.3 U13.15 U13.16 U14.7 Y1.4 | length 214.7
  Component Side w10: C102.2@225.39,464.57 v4(248.03,464.57) ; R44.2@259.25,464.57 259.25,457.28 295.63,420.91 U7.15@295.63,416.77 ; L4.1@531.5,185.04 L4.1@535.43,188.98
  Component Side w20: v4(629.92,212.6) R93.1@633.27,212.6 ; R92.1@662.01,181.1 v4(665.35,181.1) ; R94.1@740.75,192.91 v4(744.09,192.91) ; v4(1149.61,212.6) R118.1@1152.95,212.6
  Solder Side w10: U8.15@374.37,416.77 374.37,421.61 417.32,464.57 v4(421.26,464.57) C105.2@443.9,464.57
  Solder Side w20: v4(889.76,212.6) R110.1@893.11,212.6 ; R109.1@921.85,181.1 v4(925.2,181.1) ; R111.1@1000.59,188.98 v4(1003.94,188.98) ; R3.1@1181.69,181.1 v4(1185.04,181.1) ; R4.1@1260.43,181.1 v4(1263.78,184.45)
  other v4: 551.18,173.23 551.18,196.85 551.18,220.47
VCC3.3_IO: C39.1 C40.1 C41.1 C42.1 C43.1 C44.1 C45.1 C46.1 C47.1 C51.1 C52.1 C53.1 C54.1 C55.1 C56.1 C57.1 C61.1 C62.1 C63.1 C64.1 C65.1 C66.1 C75.1 C139.1 C145.2 D5.1 Q1.3 R38.2 R39.2 R40.2 R176.1 R183.1 R186.1 U1.B6 U1.C19 U1.D7 U1.F18 U1.H14 U1.J17 U1.K6 U1.K20 U1.M6 U1.M16 U1.N6 U1.N19 U1.R6 U1.R15 U1.T6 U1.T8 U1.T18 U1.U11 U1.V14 U1.W7 U1.W17 U1.Y10 U1.Y20 U15.2 | length 579
  Component Side w10: v1(1141.73,610.24) U1.R6@1157.48,594.49 ; v1(1141.73,988.19) U1.B6@1157.48,1003.94 v1(1173.23,1019.68) ; U1.T6@1157.48,562.99 v1(1173.23,547.24) ; U1.N6@1157.48,657.48 v1(1173.23,673.23) U1.M6@1157.48,688.98 ; U1.K6@1157.48,751.97 v1(1173.23,736.22) ; U1.W7@1188.98,468.5 v1(1204.72,484.25) ; U1.D7@1188.98,940.94 v1(1204.72,956.69) ; U1.T8@1220.47,562.99 v1(1236.22,578.74) ; v1(1267.72,452.76) U1.Y10@1283.46,437.01 ; v1(1299.21,547.24) U1.U11@1314.96,531.5 ; v1(1330.71,515.75) U1.U11@1314.96,531.5 ; v1(1330.71,547.24) U1.U11@1314.96,531.5 ; v1(1393.7,515.75) U1.V14@1409.45,500 ; U1.H14@1409.45,814.96 v1(1425.2,830.71) ; v1(1425.2,610.24) U1.R15@1440.94,594.49 ; v1(1456.69,704.72) U1.M16@1472.44,688.98 ; v1(1488.19,484.25) U1.W17@1503.94,468.5 ; U1.J17@1503.94,783.46 v1(1519.68,799.21) ; v1(1519.68,862.2) U1.F18@1535.43,877.95 ; U1.T18@1535.43,562.99 v1(1551.18,578.74) ; v1(1551.18,673.23) U1.N19@1566.93,657.48 ; U1.C19@1566.93,972.44 v1(1582.68,956.69) ; v1(1582.68,452.76) U1.Y20@1598.43,437.01 ; v1(1582.68,736.22) U1.K20@1598.43,751.97
VCCADC: C76.1 C77.1 L3.1 U1.J9 | length 22.3
  Component Side w10: U1.J9@1251.97,783.46 v1(1267.72,767.72)
VCCPLL: C73.1 C74.1 L1.1 L2.1 U1.G8 | length 22.3
  Component Side w10: U1.G8@1220.47,846.46 v1(1236.22,862.2)
VDDH_REG: C115.2 C130.2 R60.2 R61.2 R65.2 R66.2 U10.8 U11.8
VDDIO_REG: C129.2 R72.1 R76.1 U10.27
VOSNS: C26.2 R?.1 U3.5
VREF: C1.2 C2.2 C3.2 C4.2 C25.2 U1.H6 U1.P6 U2.H1 U2.M8 U3.6 | length 1831
  Component Side w8: v1(688.98,704.72) U2.M8@704.72,720.47
  Component Side w10: U2.H1@484.25,846.46 v1(500,830.71) ; U1.P6@1157.48,625.98 v1(1173.23,610.24) ; U1.H6@1157.48,814.96 v1(1173.23,830.71)
  Component Side w20: 610.24,500 v4(610.24,720.47) v4(610.24,814.96)
  Component Side w25: v4(287.4,614.17) v4(287.4,590.55) 377.95,500 610.24,500 v4(944.88,500)
  Inner Layer 2 w6.4: v1(1173.23,610.24) 1157.48,625.98 1157.48,814.96 v1(1173.23,830.71)
  Inner Layer 2 w15: v4(944.88,500) 1062.99,500 v1(1173.23,610.24)
  Solder Side w6.4: v1(500,830.71) 515.75,814.96 v4(610.24,814.96) ; v4(610.24,720.47) 673.23,720.47 C4.2@686.02,707.68
  Solder Side w8: C4.2@686.02,704.72 C4.2@686.02,707.68
VRN: R30.2 U1.G5 | length 22.3
  Component Side w10: U1.G5@1125.98,846.46 v1(1141.73,862.2)
VRP: R29.2 U1.H5 | length 22.3
  Component Side w7.5: v1(1110.24,799.21) U1.H5@1125.98,814.96
VTTRAM: C13.2 C14.2 C15.2 C16.2 R5.2 R6.2 R7.2 R8.2 R9.2 R10.2 R11.2 R12.2 R13.2 R14.2 R15.2 R16.2 R17.2 R18.2 R19.2 R20.2 R21.2 R22.2 R23.2 R24.2 R25.2 R26.2 R27.2 R?.2 U3.3
XOSC: R177.2 Y1.3
ZQ: R31.2 U2.L8 | length 22.3
  Component Side w7.5: U2.L8@704.72,751.97 v1(720.47,736.22)
ZYNQ_JTAG_TCK: J1.234 U1.F9
ZYNQ_JTAG_TDI: J1.235 U1.G6 | length 22.3
  Component Side w7.5: v1(1141.73,830.71) U1.G6@1157.48,846.46
ZYNQ_JTAG_TDO: J1.112 R41.1
ZYNQ_JTAG_TMS: J1.113 U1.J6 | length 22.3
  Component Side w7.5: v1(1141.73,799.21) U1.J6@1157.48,783.46
pads on no net: J1.13 J1.14 J1.15 J1.16 J1.17 J1.18 J1.19 J1.20 J1.21 J1.22 J1.58 J1.61 J1.99 J1.100 J1.101 J1.135 J1.136 J1.137 J1.138 J1.139 J1.140 J1.141 J1.142 J1.143 J1.144 U1.A10 U1.A11 U1.A12 U1.A14 U1.C17 U1.C18 U1.D14 U1.E6 U1.E13 U1.F4 U1.F12 U1.M9 U1.M10 U1.P1 U1.P3 U1.R1 U1.R2 U1.R3 U1.T1 U1.T2 U1.T4 U1.U2 U1.U3 U1.U4 U1.V1 U1.V2 U1.V3 U1.W1 U1.W3 U1.W4 U1.W5 U1.Y1 U1.Y2 U1.Y3 U1.Y4 U2.J1 U2.J9 U2.L1 U2.L9 U2.M7 U2.T7 U3.9 U10.23 U13.8 Y1.1

## Polygon pours and split planes (outlines as drawn)
GND on Ground Plane 1 (GND) (split plane): 178 vertices, not listed, extent 20.1,20.1 3208.25,1161.01
AVCC3.3 on Power Plane 1 (split plane): 506.71,20.1 20.1,20.1 20.1,334.23 39.37,334.23 39.45,334.24 46.03,334.61 52.6,335.73 59.01,337.57 65.17,340.13 71.01,343.35 76.44,347.21 81.42,351.65 85.86,356.63 89.72,362.06 92.94,367.9 95.5,374.06 97.34,380.47 98.46,387.04 98.83,393.62 98.84,393.7 98.83,393.78 98.46,400.36 97.34,406.93 95.5,413.34 92.94,419.5 89.72,425.34 85.86,430.78 84.85,431.91 506.71,431.91
VCC3.3 on Power Plane 1 (split plane): 157 vertices, not listed, extent 20.1,20.1 3208.25,1161.01
GND on Power Plane 2 (split plane): 178 vertices, not listed, extent 20.1,20.1 3208.25,1161.01
VCC1.5 on Power Plane 3 (split plane): 1152.38,386.99 990.3,386.99 936.68,440.61 935.02,441.72 933.07,442.11 73.75,442.11 71.01,444.05 65.17,447.28 59.01,449.83 52.6,451.67 46.03,452.79 39.45,453.16 39.37,453.17 20.1,453.17 20.1,690.72 25.58,691.93 33.8,694.53 41.77,697.83 49.42,701.81 56.69,706.44 63.53,711.69 69.89,717.52 75.71,723.87 80.96,730.71 85.59,737.98 89.57,745.63 92.87,753.6 95.47,761.82 97.33,770.24 98.46,778.79 98.83,787.35 98.84,787.4 98.83,787.45 98.46,796.02 97.33,804.56 95.47,812.98 92.87,821.2 89.57,829.17 85.59,836.82 80.96,844.09 75.71,850.93 69.89,857.29 63.53,863.11 56.69,868.36 49.42,872.99 41.77,876.98 33.8,880.28 25.58,882.87 20.1,884.08 20.1,1161.01 1152.38,1161.01
VCC3.3_IO on Power Plane 3 (split plane): 3208.25,884.08 3202.77,882.87 3194.54,880.28 3186.58,876.98 3178.93,872.99 3171.66,868.36 3164.82,863.11 3158.46,857.29 3152.64,850.93 3147.39,844.09 3142.75,836.82 3138.77,829.17 3135.47,821.2 3132.88,812.98 3131.01,804.56 3129.89,796.02 3129.51,787.45 3129.51,787.4 3129.51,787.35 3129.89,778.79 3131.01,770.24 3132.88,761.82 3135.47,753.6 3138.77,745.63 3142.75,737.98 3147.39,730.71 3152.64,723.87 3158.46,717.52 3164.82,711.69 3171.66,706.44 3178.93,701.81 3186.58,697.83 3194.54,694.53 3202.77,691.93 3208.25,690.72 3208.25,453.17 3188.98,453.17 3188.9,453.16 3182.32,452.79 3175.74,451.67 3169.34,449.83 3163.18,447.28 3157.34,444.05 3151.9,440.19 3146.93,435.75 3142.49,430.78 3138.63,425.34 3135.4,419.5 3132.85,413.34 3131,406.93 3129.89,400.36 3129.52,393.78 3129.51,393.7 3129.52,393.62 3129.89,387.04 3131,380.47 3132.85,374.06 3135.4,367.9 3138.63,362.06 3142.49,356.63 3146.93,351.65 3151.9,347.21 3157.34,343.35 3163.18,340.13 3169.34,337.57 3175.74,335.73 3182.32,334.61 3188.9,334.24 3188.98,334.23 3208.25,334.23 3208.25,314.96 3208.25,20.1 1768.13,20.1 1768.13,129.92 1768.09,130.27 1767.78,135.11 1766.76,140.21 1765.09,145.14 1762.79,149.81 1759.9,154.13 1756.47,158.04 1752.56,161.47 1748.23,164.36 1743.57,166.66 1738.64,168.34 1733.54,169.35 1728.7,169.67 1728.35,169.7 1727.99,169.67 1723.16,169.35 1718.05,168.34 1713.13,166.66 1708.46,164.36 1704.14,161.47 1700.22,158.04 1696.79,154.13 1693.9,149.81 1691.6,145.14 1689.93,140.21 1688.92,135.11 1688.6,130.27 1688.56,129.92 1688.56,20.1 516.91,20.1 516.91,431.91 930.96,431.91 984.58,378.28 986.24,377.18 988.19,376.79 1157.48,376.79 1159.43,377.18 1161.09,378.28 1162.19,379.94 1162.58,381.89 1162.58,1161.01 3208.25,1161.01
GND on Power Plane 3 (split plane): 506.71,20.1 20.1,20.1 20.1,334.23 39.37,334.23 39.45,334.24 46.03,334.61 52.6,335.73 59.01,337.57 65.17,340.13 71.01,343.35 76.44,347.21 81.42,351.65 85.86,356.63 89.72,362.06 92.94,367.9 95.5,374.06 97.34,380.47 98.46,387.04 98.83,393.62 98.84,393.7 98.83,393.78 98.46,400.36 97.34,406.93 95.5,413.34 92.94,419.5 89.72,425.34 85.86,430.78 84.85,431.91 506.71,431.91

## Other copper
Component Side:
  region net AVCC3.3: 507.87,200.79 480.31,200.79 460.63,181.1 460.63,122.05 507.87,122.05
  region net VCC3.3: 519.68,161.42 562.99,161.42 562.99,232.28 519.68,232.28
Solder Side:
  region net VREF: 275.59,661.42 299.21,661.42 299.21,578.74 267.72,578.74 267.72,610.24 275.59,618.11
Ground Plane 1 (GND) (plane layer: these items are gaps in the copper):
  text "NOTE: INVERTED LAYER" at 3831.1,-700 h100
  text "UWHEP SAM4N MMC - LAYER 3 (POWER, GND)" at 3821.1,-810 h60
  text "THIS WRITING IS COPPER" at 3821.1,-930 h60
Power Plane 1 (plane layer: these items are gaps in the copper):
  lines w10: 0,0 0,460.63 23.62,437.01 511.81,437.01 511.81,0 0,0
Power Plane 2 (plane layer: these items are gaps in the copper):
  lines w10: 492.13,0 492.13,0
Power Plane 3 (plane layer: these items are gaps in the copper):
  lines w10: 3.94,437.01 0,433.07 0,1181.1 1157.48,1181.1 1157.48,381.89 988.19,381.89 933.07,437.01 511.81,437.01 ; 511.81,437.01 511.81,0 0,0 0,460.63 23.62,437.01 511.81,437.01

## Silkscreen, mask and mechanical layers (free items; w line width, h text height)
Top Overlay:
  lines w3.94: 5,157 3223,157
Bottom Overlay:
  lines w3.94: 5,157 3223,157
Component Placement:
  lines w3.94: 78.74,866.14 103.71,841.17 cw(c49.95,787.4) 125.98,787.4 125.98,157.48 3102.36,157.48 3102.36,768.9 cw(c3223.07,768.9) 3137.72,854.25 3149.61,866.14 3149.61,1181.1 78.74,1181.1 78.74,866.14
Fab Drawings:
  lines w5: -3564.25,-1214.25 -3364.25,-1214.25 ; -3564.25,685.75 -3364.25,685.75 ; -3564.25,2585.75 -3364.25,2585.75 ; -689.25,-3114.25 -689.25,-2914.25 ; -689.25,4285.75 -689.25,4485.75 ; 2185.75,-3114.25 2185.75,-2914.25 ; 2185.75,4285.75 2185.75,4485.75 ; 3235.75,-2614.25 7735.75,-2614.25 ; 3235.75,-2314.25 7735.75,-2314.25 ; 3235.75,-2014.25 4735.75,-2014.25 ; 4735.75,-2914.25 4735.75,-2314.25 4735.75,-1714.25 ; 5060.75,-3114.25 5060.75,-2914.25 ; 5060.75,4285.75 5060.75,4485.75 ; 6835.75,-2914.25 6835.75,-2314.25 ; 7735.75,-1214.25 7935.75,-1214.25 ; 7735.75,2585.75 7935.75,2585.75 ; 3235.75,-2914.25 3235.75,-1714.25 ; 3235.75,-2914.25 7735.75,-2914.25 ; 3235.75,-2914.25 1835.75,-2914.25 1835.75,-1714.25 3235.75,-1714.25 ; 3235.75,-1714.25 4735.75,-1714.25 ; 4735.75,-1714.25 7735.75,-1714.25 7735.75,-2914.25 ; 7735.75,-2914.25 7735.75,4285.75 -3364.25,4285.75 -3364.25,-2914.25 7735.75,-2914.25 ; -3564.25,-3114.25 -3564.25,4485.75 7935.75,4485.75 7935.75,-3114.25 -3564.25,-3114.25
  lines w15: -2849.37,2389.69 -2249.37,2389.69 -2249.37,2439.69 -2849.37,2439.69 -2849.37,2389.69 ; -2849.37,2689.69 -2849.37,2739.69 -2249.37,2739.69 -2249.37,2689.69 -2849.37,2689.69 ; -2849.37,2789.69 -2849.37,2839.69 -2249.37,2839.69 -2249.37,2789.69 -2849.37,2789.69 ; -2849.37,3089.69 -2249.37,3089.69 -2249.37,3139.69 -2849.37,3139.69 -2849.37,3089.69 ; -2699.37,2289.69 -2699.37,2339.69 -2399.37,2339.69 -2399.37,2289.69 -2699.37,2289.69 ; -2699.37,2489.69 -2399.37,2489.69 -2399.37,2539.69 -2699.37,2539.69 -2699.37,2489.69 ; -2699.37,2589.69 -2399.37,2589.69 -2399.37,2639.69 -2699.37,2639.69 -2699.37,2589.69 ; -2699.37,2889.69 -2449.37,2889.69 -2399.37,2889.69 -2399.37,2939.69 -2699.37,2939.69 -2699.37,2889.69 ; -2699.37,2989.69 -2699.37,3039.69 -2399.37,3039.69 -2399.37,2989.69 -2449.37,2989.69 -2699.37,2989.69 ; -2699.37,3189.69 -2399.37,3189.69 -2399.37,3239.69 -2699.37,3239.69 -2699.37,3189.69
  text "1" at -2137.25,4350.75 h70
  text "2" at 722.75,4350.75 h70
  text "3" at 3602.75,4350.75 h70
  text "4" at 6472.75,4350.75 h70
  text "Specifications:" at 3381.1,4130 h100
  text "1. Dielectric material is Tetrafunctional FR-4 with Tg > 170 C" at 3381.1,3950 h40
  text "2. Overall thickness is 1.6mm +/- 0.16mm" at 3381.1,3890 h40
  text "3. Controlled impedance: Impedance Control Not Required" at 3381.1,3830 h40
  text "4. All layers use 1/2 oz. copper (before plating)" at 3381.1,3770 h40
  text "5. Holes:" at 3381.1,3710 h40
  text "Layer Stackup" at -3139.37,3669.69 h100
  text "a. Hole diameters are given as after plating +/- 3mils, except as noted on drill drawing" at 3441.1,3650 h40
  text "b. Drill files are in Excellon Format, 2.4 Absolute Inches, with leading zeros suppressed" at 3441.1,3590 h40
  text "c. All holes are exposed" at 3441.1,3530 h40
  text "d. Drill locations are partioned into 3 separate drill files:" at 3441.1,3470 h40
  text "A" at -3489.25,3444.75 h70
  text "A" at 7810.75,3444.75 h70
  text "* Plated-through holes" at 3501.1,3410 h40
  text "* Non-Plated-through holes" at 3501.1,3350 h40
  text "Top" at -2600,3300 h40
  text "* Plated slots" at 3501.1,3290 h40
  text "6. Finish: immersion gold" at 3381.1,3230 h40
  text "-- Layer 1 (Signal)" at -2199.37,3189.69 h40
  text "7. Minimum observed signal layer clearances is 6 mils on layers 1, 2, 5 and 6" at 3381.1,3170 h40
  text "8. Solder Mask (SMOBC) to be applied to both top and bottom sides." at 3381.1,3110 h40
  text "-- Layer 2 (Ground Plane)" at -2199.37,3089.69 h40
  text "Mask shall be photoimagable, with maximum thickness of 3 mils" at 3501.1,3050 h40
  text "-- Layer 3 (Signal)" at -2199.37,2989.69 h40
  text "9. Layers 3 and 4 are power planes and are INVERTED" at 3381.1,2990 h40
  text "10. Silkscreen to be applied to both top and bottom sides. Silkscreen shall be white ink" at 3381.1,2930 h40
  text "-- Layer 4 (Signal)" at -2199.37,2889.69 h40
  text "11. Board shall be manufactured in accordance with IPC-6011 and IPC-6012 (class 2)" at 3381.1,2870 h40
  text "12. Combination of bow and twist shall not exceed 10 mils/inch along any direction" at 3381.1,2810 h40
  text "-- Layer 5 (Power Plane)" at -2199.37,2789.69 h40
  text "13. Design origin is at the bottom-left corner of the PCB" at 3381.1,2750 h40
  text "-- Layer 6 (Power Plane)" at -2199.37,2689.69 h40
  text "14. Testing:" at 3381.1,2690 h40
  text "a. All layers to undergo optical inspection (machine-based) of all layers before lamination" at 3441.1,2630 h40
  text "-- Layer 7 (Signal)" at -2199.37,2589.69 h40
  text "b. Boards will receive a full electrical test based on Gerber and IPC-D-356A data." at 3441.1,2570 h40
  text "DC resistance shall be 10 ohms or less" at 3561.1,2510 h40
  text "-- Layer 8 (Signal)" at -2199.37,2489.69 h40
  text "c. Resistance between planes and non-connected plated through holes and vias shall be 10 Megaohms or larger" at 3441.1,2450 h40
  text "-- Layer 9 (PowerPlane)" at -2199.37,2389.69 h40
  text "15. Locations in IPC-D-356A file are given in 2.4 English units" at 3381.1,2390 h40
  text "16. Mechanical layers 29 and 30 correspond to top and bottom assembly part reference respectively." at 3381.1,2315 h40
  text "-- Layer 10 (Signal)" at -2199.37,2289.69 h40
  text "17. Mechanical layer 2 corresponds to the board outline and layer 16 to the fab drawings." at 3381.1,2240 h40
  text "Bottom" at -2660,2180 h40
  text "x. Impedance: 40 and 50 ohm single-ended and 100 ohm differential traces on internal/external layers as follows:" at 3380,2120 h40
  text "Internal layers (3, 4, 7, 8):" at 3480,2040 h40
  text "40 Ohm: 6 mil tracks in artwork" at 3560,1960 h40
  text "50 Ohm: 4.5 mil tracks in artwork" at 3560,1880 h40
  text "100 Ohm, differential: 4.4 mil tracks with edge-to-edge separation in range of 5.45 to 6.05 mils." at 3560,1800 h40
  text "External Layers (1 and 10):" at 3480,1720 h40
  text "40 Ohm: 9.5 mil tracks in artwork" at 3560,1640 h40
  text "50 Ohm: 7.5 mil tracks in artwork" at 3560,1560 h40
  text "B" at -3489.25,1552.75 h70
  text "B" at 7810.75,1552.75 h70
  text "100 Ohm, differential: 5 mil tracks with 6mil edge-to-edge separation" at 3560,1480 h40
  text "Width of above-listed track/layer combinations may be adjusted by vendor to obtain desired" at 3480,1400 h40
  text "impedance within +/- 10%. All other track widths in the artwork are given as before-etching." at 3480,1320 h40
  text "C" at -3489.25,-357.25 h70
  text "ENGINEER:" at 3285.75,-1814.25 h45
  text "TITLE:" at 4785.75,-1814.25 h45
  text "Univ. of Wisconsin-Madison" at 1871.1,-1830 h70
  text "UW IPMC Zynq Module" at 4835.75,-1944.25 h70
  text "Madison, WI 53706" at 1871.1,-1950 h70
  text "Vicente, M., Gorski, T., Tikalsky, J." at 3301.1,-1950 h60
  text "PCB DESIGNER:" at 3285.75,-2109.25 h45
  text "Vicente, M." at 3335.75,-2234.25 h70
  text "D" at -3489.25,-2247.25 h70
  text "D" at 7810.75,-2247.25 h70
  text "DATE:" at 3285.75,-2414.25 h45
  text "PART NO.:" at 4785.75,-2414.25 h45
  text "REV:" at 6885.75,-2414.25 h45
  text "10AUG2016" at 3335.75,-2534.25 h70
  text ".Revision" at 6915.75,-2544.25 h70
  text "FILE NAME:" at 3285.75,-2714.25 h45
  text "DWG NO:" at 4785.75,-2714.25 h45
  text "SCALE:" at 6885.75,-2714.25 h45
  text "UW_SAM4N_MMC_DevBoard" at 3335.75,-2834.25 h70
  text "1:1" at 6905.75,-2844.25 h70
  text "1" at -2137.25,-3049.25 h70
  text "2" at 722.75,-3049.25 h70
  text "3" at 3602.75,-3049.25 h70
  text "4" at 6472.75,-3049.25 h70
Drill Drawing:
  circle w4: c-3479.14,4482.22 r22.22
  lines w4: -3501.37,4271.11 -3490.25,4271.11 -3490.25,4260 -3468.03,4260 -3468.03,4271.11 -3456.92,4271.11 -3456.92,4293.33 -3468.03,4293.33 -3468.03,4304.44 -3490.25,4304.44 -3490.25,4293.33 -3501.37,4293.33 -3501.37,4271.11 ; -3501.37,4404.44 -3456.92,4404.44 -3479.14,4360 -3501.37,4404.44 ; -3501.37,4560 -3456.92,4560 -3456.92,4604.44 -3501.37,4604.44 -3501.37,4560
  lines w15: -3540.39,4230 556.07,4230 ; -3540.39,4630 556.07,4630 ; -3181.68,4130 -3181.68,4730 ; -2725,4130 -2725,4730 ; -1836.46,4130 -1836.46,4730 ; -1507.75,4130 -1507.75,4730 ; -1027.08,4130 -1027.08,4730 ; -274.5,4130 -274.5,4730 ; -3540.39,4130 556.07,4130 556.07,4730 -3540.39,4730 -3540.39,4130
  text "Symbol" at -3480.39,4660 h48
  text "Hit Count" at -3151.68,4660 h48
  text "Finished Hole Size" at -2695,4660 h48
  text "Plated" at -1806.46,4660 h48
  text "Hole Type" at -1477.75,4660 h48
  text "Physical Length" at -997.08,4660 h48
  text "Rout Path Length" at -244.5,4660 h48
  text "24" at -3151.68,4560 h40
  text "8.00mil (0.203mm)" at -2695,4560 h40
  text "PTH" at -1806.46,4560 h40
  text "Round" at -1477.75,4560 h40
  text "-" at -997.08,4560 h40
  text "-" at -244.5,4560 h40
  text "35" at -3151.68,4460 h40
  text "7.87mil (0.200mm)" at -2695,4460 h40
  text "PTH" at -1806.46,4460 h40
  text "Round" at -1477.75,4460 h40
  text "-" at -997.08,4460 h40
  text "-" at -244.5,4460 h40
  text "42" at -3151.68,4360 h40
  text "6.00mil (0.152mm)" at -2695,4360 h40
  text "PTH" at -1806.46,4360 h40
  text "Round" at -1477.75,4360 h40
  text "-" at -997.08,4360 h40
  text "-" at -244.5,4360 h40
  text "274" at -3151.68,4260 h40
  text "7.00mil (0.178mm)" at -2695,4260 h40
  text "PTH" at -1806.46,4260 h40
  text "Round" at -1477.75,4260 h40
  text "-" at -997.08,4260 h40
  text "-" at -244.5,4260 h40
  text "375 Total" at -3151.68,4160 h40

## Dimensions
0,-39.37 to 3228.35,-157.48 on Fab Drawings
-39.37,0 to -39.37,1181.1 on Fab Drawings
0,-39.37 to 1728.35,-39.37 on Fab Drawings
-39.37,0 to -39.37,393.7 on Fab Drawings
-39.37,0 to -39.37,787.4 on Fab Drawings